# Altium PCB PCB1.PcbDoc
Units mm, origin at the board's own origin, x right, y up, seen from the top; angles counter-clockwise.
Board outline 67 x 60 mm, 2 copper layers (Top Layer, Bottom Layer); 66 components, 52 nets, 188 pads, 45 vias.
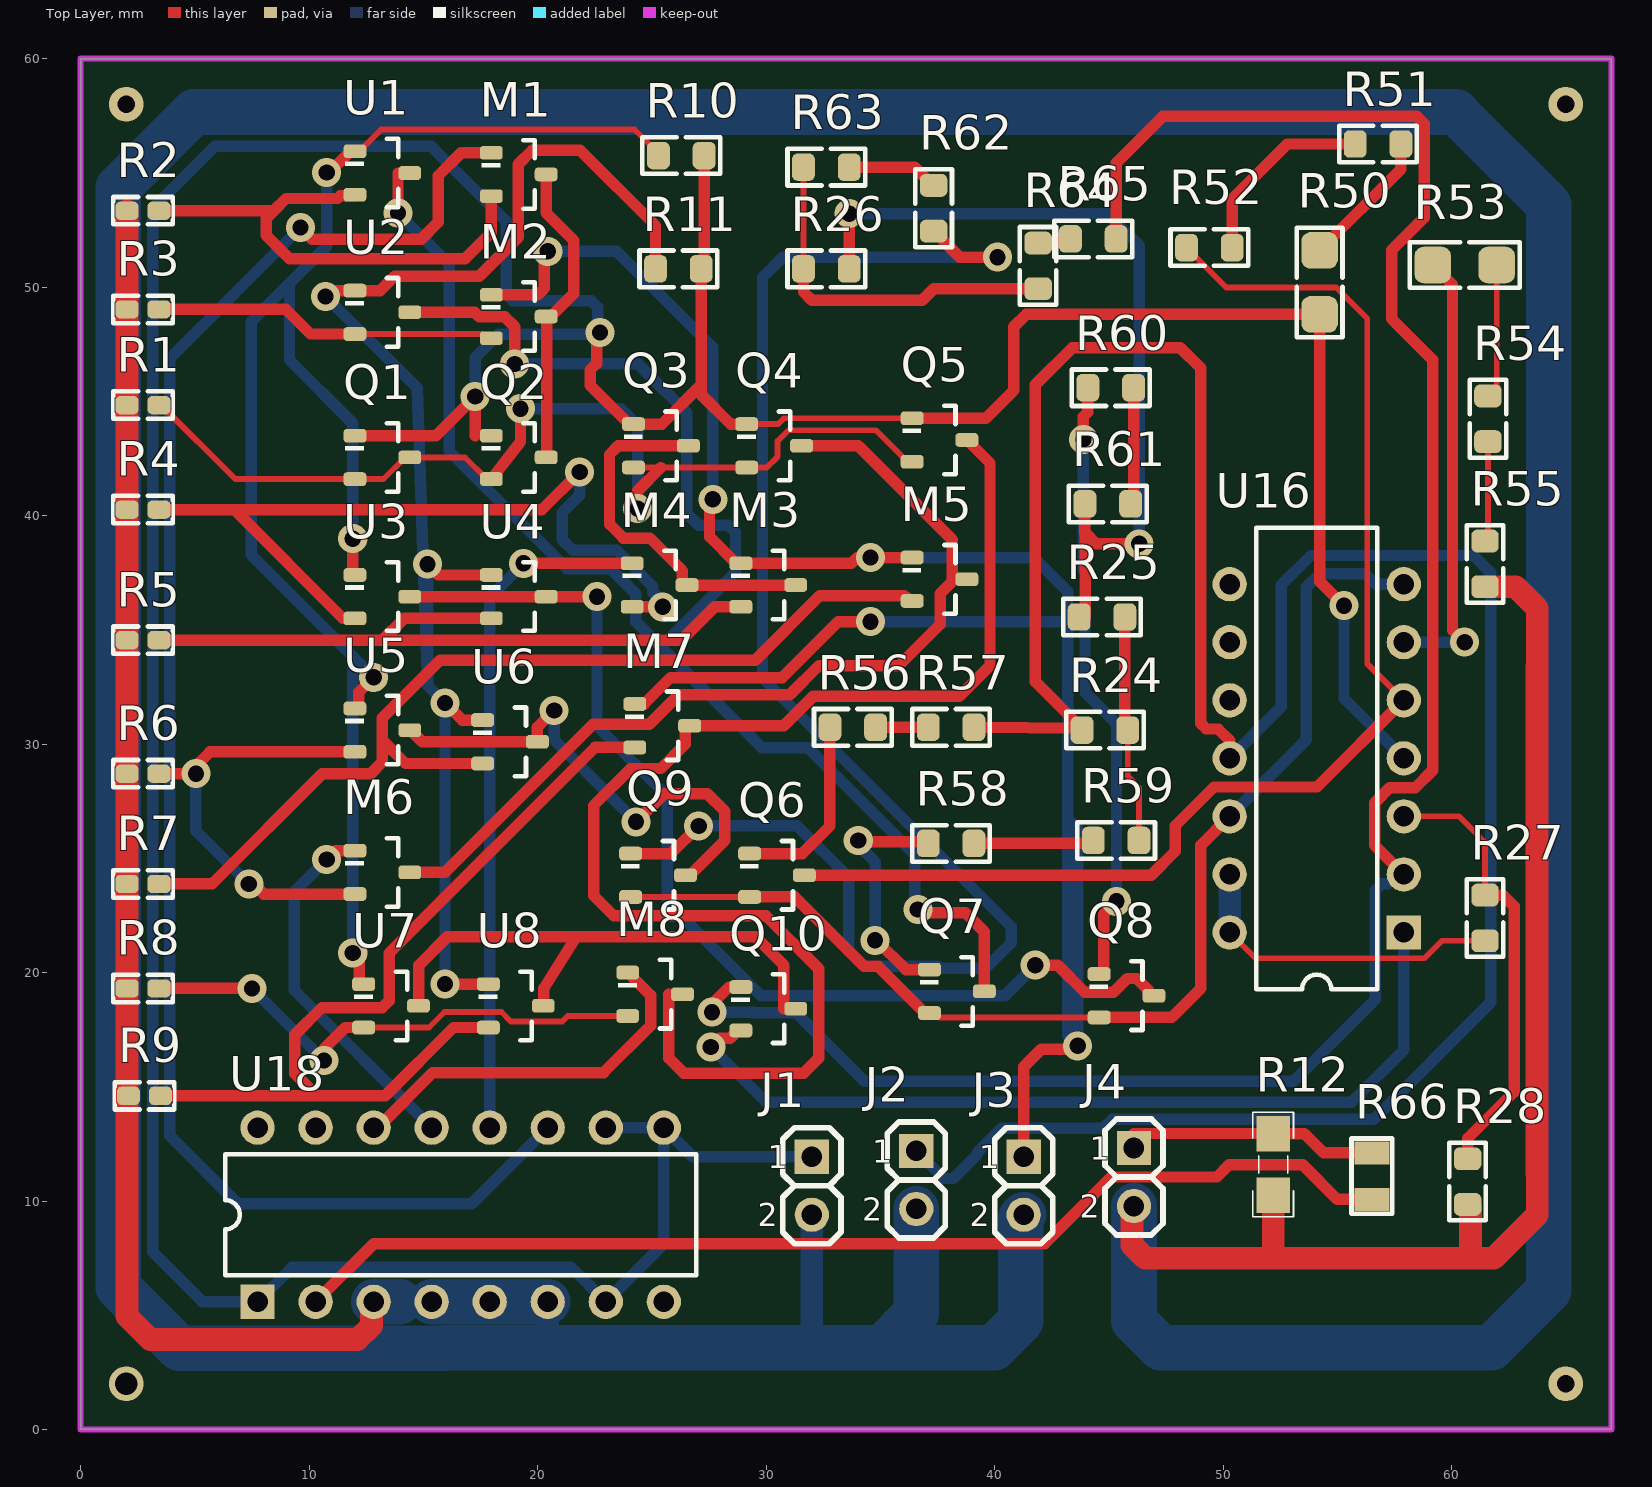
[diagram p0: Top Layer view]
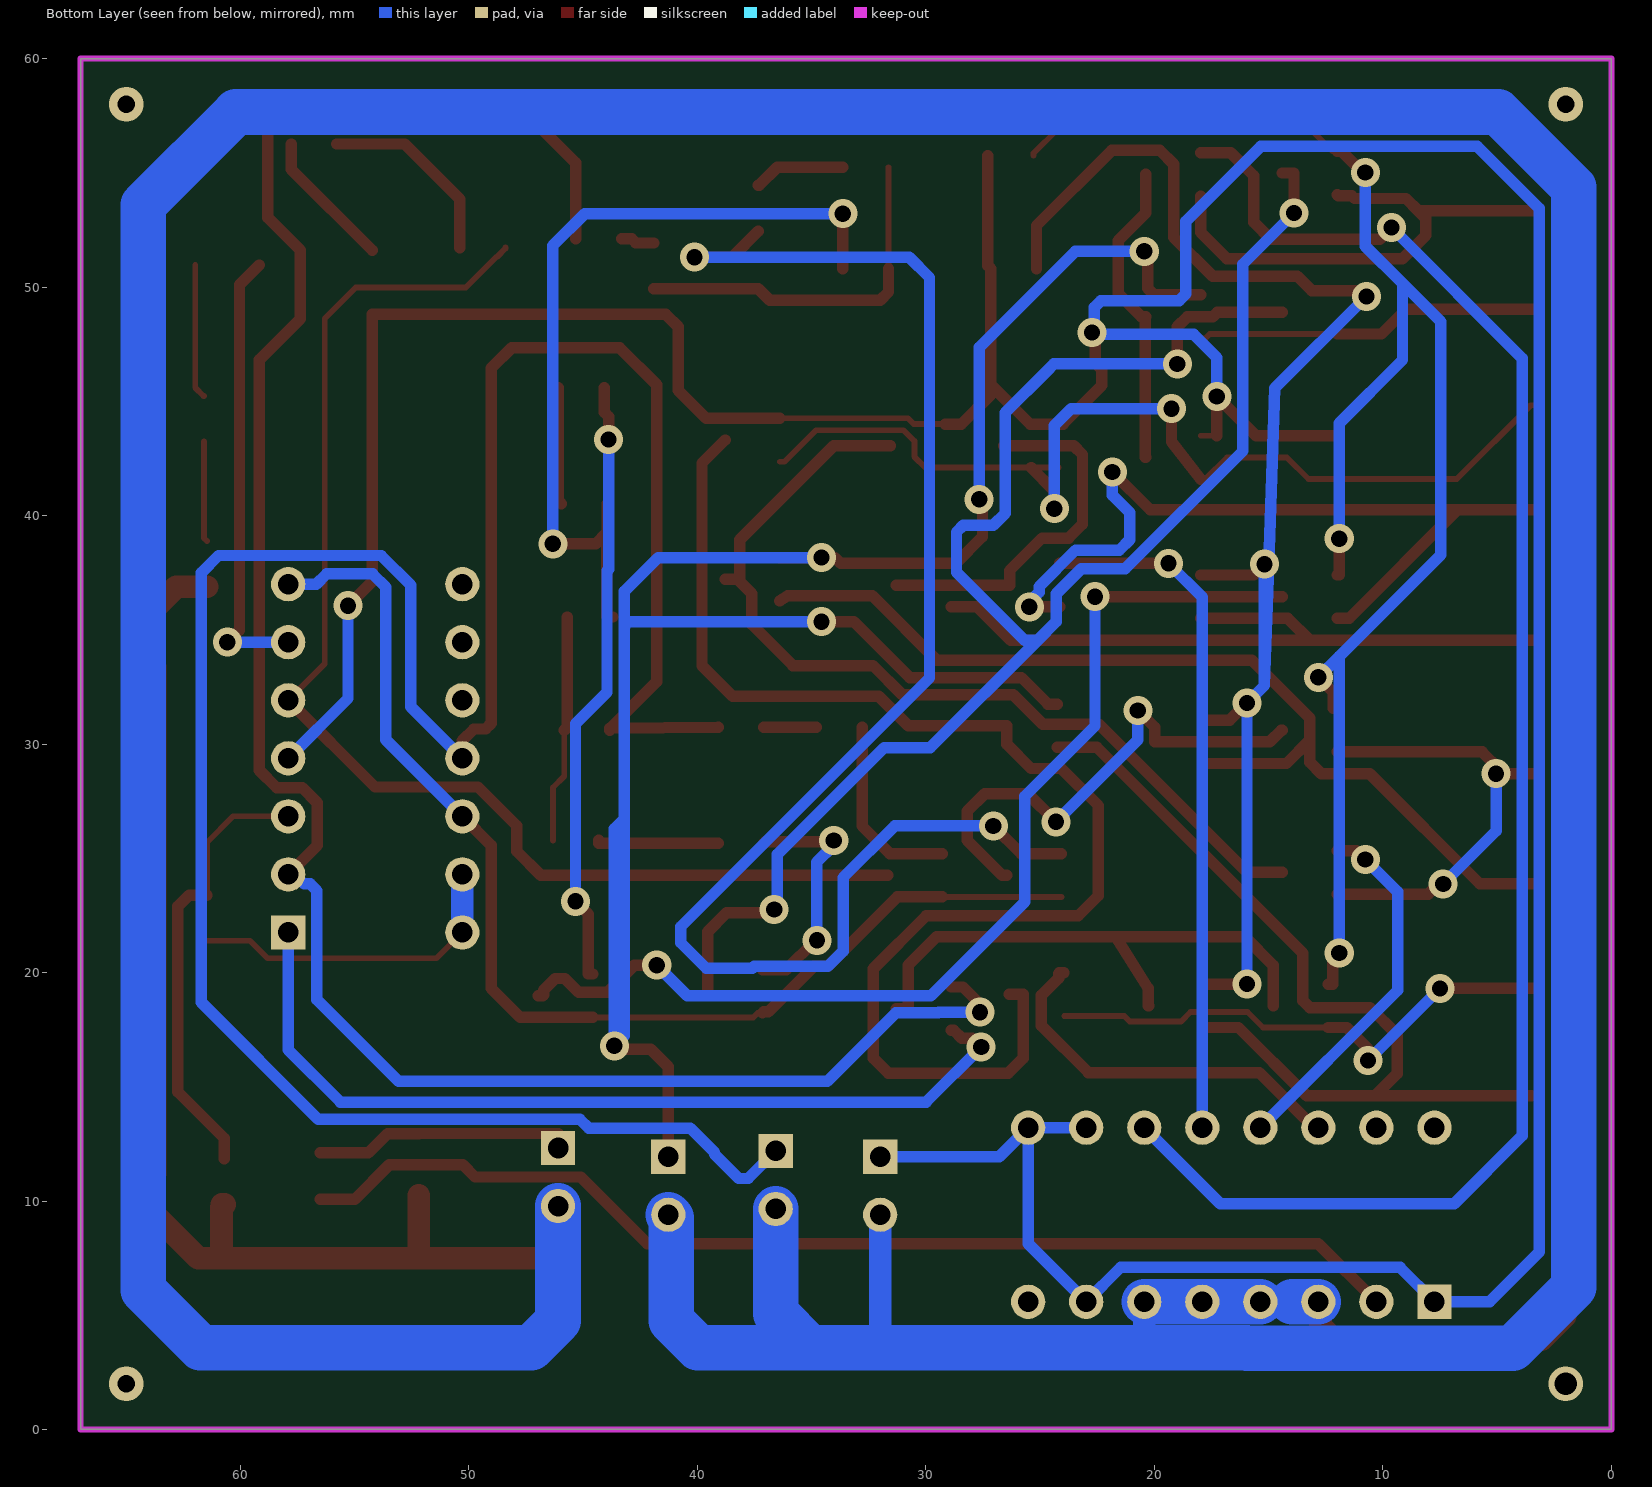
[diagram p1: Bottom Layer view, seen from below]

## Layer stack, top to bottom
Top Solder: solder mask 0.0102, Solder Resist, Dk 3.5
Top Layer: signal copper 0.0356
Dielectric 1: dielectric 0.32, FR-4, Dk 4.8
Bottom Layer: signal copper 0.0356
Bottom Solder: solder mask 0.0102, Solder Resist, Dk 3.5

## Board outline
0,0 0,60 67,60 67,0

## Design rules (kind name [scope] priority, off if disabled: settings)
Clearance [All] p1: gap=0.254 ignorepadtopadclearanceinfootprint=FALSE except(0: Arc-Hole Track-Hole SMDPad-Hole THPad-Hole Via-Hole Fill-Hole Poly-Hole Region-Hole Text-Hole)
PolygonConnect [All] p1: connectstyle=Relief reliefconductorwidth=0.254 reliefentries=4 polygonreliefangle="90 Angle" airgapwidth=0.254
RoutingVias [All] p1: holewidth=0.711 width=1.27 viastyle="Through Hole" minholewidth=0.711 minwidth=1.27 maxholewidth=0.711 maxwidth=1.27
SolderMaskExpansion [All] p1: expansion=0.102 istentingtop=FALSE
Width [All] p1: maxlimit=2 minlimit=0.254 preferedwidth=0.5 minimp=50.000000 maximp=50.000000 favimp=50.000000
30 further rules are at their usual default settings.

## Components (designator, comment, footprint, x,y, rotation, side; value= is the part's Value field where it differs from the comment)
J1 "+5 _ GND" MHDR1X02-254P 32.004,11.938 r270 top
J2 "-5 _ GND" MHDR1X02-254P 36.576,12.192 r270 top
J3 "+1.58 _ GND" MHDR1X02-254P 41.275,11.938 r270 top
J4 "CLK _ GND" MHDR1X02-254P 46.101,12.319 r270 top
M1 "BSS84" SOT-23 19.177,54.93 r0 top
M2 "BSS84" SOT-23 19.177,48.707 r0 top
M3 "BSS84" SOT-23 30.099,36.957 r0 top
M4 "BSS84" SOT-23 25.343,36.957 r0 top
M5 "BSS84" SOT-23 37.592,37.211 r0 top
M6 "BSS84" SOT-23 13.208,24.384 r0 top
M7 "BSS84" SOT-23 25.457,30.8 r0 top
M8 "BSS84" SOT-23 25.146,19.05 r0 top
Q1 "BC857" SOT-23 13.208,42.545 r0 top
Q2 "BC857" SOT-23 19.177,42.545 r0 top
Q3 "BC857" SOT-23 25.4,43.053 r0 top
Q4 "BC857" SOT-23 30.353,43.053 r0 top
Q5 "BC857" SOT-23 37.592,43.307 r0 top
Q6 "BC847" SOT-23 30.48,24.257 r0 top
Q7 "BC847" SOT-23 38.354,19.177 r0 top
Q8 "BC847" SOT-23 45.777,18.984 r0 top
Q9 "BC847" SOT-23 25.273,24.257 r0 top
Q10 "BC847" SOT-23 30.099,18.415 r0 top
R1 "1k" R0603 2.732,44.831 r0 top
R2 "1k" R0603 2.732,53.34 r0 top
R3 "1k" R0603 2.732,49.022 r0 top
R4 "1k" R0603 2.732,40.259 r0 top
R5 "1k" R0603 2.732,34.544 r0 top
R6 "1k" R0603 2.732,28.702 r0 top
R7 "1k" R0603 2.732,23.876 r0 top
R8 "1k" R0603 2.732,19.304 r0 top
R9 "1k" R0603 2.794,14.605 r0 top
R10 "47" R0805 26.289,55.753 r0 top value=50
R11 "47" R0805 26.162,50.8 r0 top value=50
R12 "10K" RESC3413X04N 52.197,11.595 r90 top
R24 "68" R0805 44.831,30.607 r180 top
R25 "68" R0805 44.704,35.56 r0 top
R26 "68" R0805 32.639,50.8 r0 top
R27 "68" R0805 61.468,22.39 r270 top
R28 "68" R0805 60.706,10.849 r270 top
R50 "100" R1206 54.229,50.203 r270 top value=157
R51 "10" R0805 56.785,56.261 r0 top value=157
R52 "47" R0805 49.403,51.727 r0 top value=157
R53 "100" R1206 60.579,50.965 r180 top value=157
R54 "10" R0805 61.595,44.234 r90 top value=157
R55 "47" R0805 61.468,37.884 r90 top value=157
R56 "68" R0805 33.798,30.734 r0 top
R57 "68" R0805 38.1,30.734 r0 top
R58 "68" R0805 38.1,25.654 r0 top
R59 "68" R0805 45.323,25.781 r0 top
R60 "68" R0805 45.085,45.593 r0 top
R61 "68" R0805 44.958,40.513 r180 top
R62 "68" R0805 37.338,53.451 r90 top
R63 "68" R0805 32.639,55.245 r180 top
R64 "68" R0805 41.91,50.927 r90 top
R65 "68" R0805 44.323,52.108 r0 top
R66 "Resistor SMD 0805" SMD-0805-RES 56.515,11.087 r180 top value=33
U1 "2N7002" SOT-23 13.208,54.991 r0 top
U2 "2N7002" SOT-23 13.208,48.895 r0 top
U3 "2N7002" SOT-23 13.208,36.449 r0 top
U4 "2N7002" SOT-23 19.177,36.449 r0 top
U5 "2N7002" SOT-23 13.208,30.607 r0 top
U6 "2N7002" SOT-23 18.796,30.099 r0 top
U7 "2N7002" SOT-23 13.589,18.542 r0 top
U8 "2N7002" SOT-23 19.05,18.542 r0 top
U16 "LF347" DIP14 54.102,29.375 r90 top
U18 "74LS161A" "DIP 16" 16.637,9.398 r90 top

## Footprints (in the part's own frame and the unit in brackets; to place one, negate y for a bottom-side part, rotate by r counter-clockwise, add the part's x,y. Pads: shape width x height; smd on the part's side, far side on the other; paste and mask are expansions set on the pad)
DIP14 [mm] "DIP; 14 Leads; Row Spacing 7.62 mm; Pitch 2.54 mm"
  rect 1.5x1.5 hole 0.9: 1(-7.62,-3.81)
  round 1.5 hole 0.9: 2(-5.08,-3.81) 3(-2.54,-3.81) 4(0,-3.81) 5(2.54,-3.81) 6(5.08,-3.81) 7(7.62,-3.81) 8(7.62,3.81) 9(5.08,3.81) 10(2.54,3.81) 11(0,3.81) 12(-2.54,3.81) 13(-5.08,3.81) 14(-7.62,3.81)
  silkscreen extent -10.1,-2.65 10.1,2.65
"DIP 16" [mm] "DIP; 16 Leads; Row Spacing 7.62 mm; Pitch 2.54 mm (www.Smartw.ir)"
  rect 1.5x1.5 hole 0.9: 1(-3.81,8.89)
  round 1.5 hole 0.9: 2(-3.81,6.35) 3(-3.81,3.81) 4(-3.81,1.27) 5(-3.81,-1.27) 6(-3.81,-3.81) 7(-3.81,-6.35) 8(-3.81,-8.89) 9(3.81,-8.89) 10(3.81,-6.35) 11(3.81,-3.81) 12(3.81,-1.27) 13(3.81,1.27) 14(3.81,3.81) 15(3.81,6.35) 16(3.81,8.89)
  silkscreen extent -2.65,-10.3 2.65,10.3, body extent -3.93,-10 3.94,10, height 5.08
MHDR1X02-254P [mm] "Male Header 1X02 with 2.54 mm Pitch"
  rect 1.5x1.5 hole 0.9: 1(0,0)
  round 1.5 hole 0.9: 2(2.54,0)
  silkscreen extent -1.27,-1.27 3.81,1.27, body extent -1.27,-1.27 3.81,1.27, height 8.43
R0603 [mm] "CHIP Resistor 1/10 WATT, 1.6x0.8mm, 0603, 1608"
  rrect50% 1x0.8 smd mask+0.05: 1(-0.7,0) 2(0.7,0)
  silkscreen extent -1.32,-0.6 1.32,0.6, body extent -0.85,-0.4 0.85,0.4, height 0.56
R0805 [mm] "CHIP RESISTOR 1/8 WATT ,2.0X1.3mm, 0805, 2012"
  rrect50% 1x1.2 smd mask+0.05: 1(-1,0) 2(1,0)
  Top Layer pour cut-out: -0.5,0.8 0.5,0.8 0.5,-0.8 -0.5,-0.8
  silkscreen extent -1.7,-0.8 1.7,0.8, body extent -1.15,-0.67 1.15,0.68, height 0.76
R1206 [mm] "CHIP RESISTOR 1/4 WATT, Body 3.2x1.6mm,1206, 3216"
  rrect50% 1.6x1.6 smd mask+0.075: 1(-1.4,0) 2(1.4,0)
  Top Layer pour cut-out: -0.8,1 -0.8,-1 0.8,-1 0.8,1
  silkscreen extent -2.4,-1 2.4,1, body extent -1.67,-0.86 1.68,0.87, height 0.85
RESC3413X04N [mm] "Chip Resistor, 2-Leads, Body 3/40x1/30mm, IPC Medium Density-Design:Abbas Basereh"
  rect 1.55x1.45 smd: 1(-1.35,0) 2(1.35,0)
  silkscreen extent -2.29,-0.89 2.29,0.89, body extent -1.25,-0.62 1.25,0.62, height 0.79
SMD-0805-RES [mil]
  rect 60x40 smd: 1(0,40) 2(0,-40)
  silkscreen extent -35,-65 35,65, body extent -24,-39 26,39, height 31
SOT-23 [mm] "SOT23, 3-Leads, Body 2.9x1.3mm, Pitch 0.95mm, Lead Span 2.5mm, IPC Medium Density (www.Smartw.ir)"
  rrect50% 1x0.6 smd: 1(-1.2,0.95) 2(-1.2,-0.95) 3(1.2,0)
  silkscreen extent -1.62,-1.5 0.7,1.5, body extent -1.16,-1.45 1.21,1.45, height 1

## Part data
J1 J2 J3 J4: library part "Header 2", "Header, 2-Pin", ComponentLinkp-URL=https://www.smartw.ir/, DatasheetVersion=2020
M1 M2 M3 M4 M5 M6 M7 M8: PSpiceTemplate="X^@REFDES %g %s %d @MODEL", Schematics' Source Library=H:\Fertige_Modelle\BSx\Files\Bss_l0_2.slb
Q1: BiasValue Power=2.857mW, PSpiceTemplate="Q^@REFDES %C %B %E @MODEL ?AREA/@AREA/", PCB Footprint=sot23
Q2 Q3 Q4 Q5 Q7 Q8 Q9 Q10: PSpiceTemplate="Q^@REFDES %C %B %E @MODEL ?AREA/@AREA/", PCB Footprint=sot23
Q6: BiasValue Power=20.78mW, PSpiceTemplate="Q^@REFDES %C %B %E @MODEL ?AREA/@AREA/", PCB Footprint=sot23
R1: library part R, BiasValue Power=18.75mW, MAX_TEMP=RTMAX, POWER=RMAX, PSpiceTemplate="R^@REFDES %1 %2 ?TOLERANCE|R^@REFDES| @VALUE TC=@TC1,@TC2 ?TOLERANCE|\n.model R^@REFDES RES R=1 DEV=@TOLERANCE% TC1=@TC1 TC2=@TC2|", VOLTAGE=RVMAX, DIST=FLAT, PCB Footprint=AXRC05, PSpice Model Type=0011, SLOPE=RSMAX, TC1=0, TC2=0
R2 R3 R4 R5 R6 R7 R8 R9 R11: library part R, MAX_TEMP=RTMAX, POWER=RMAX, PSpiceTemplate="R^@REFDES %1 %2 ?TOLERANCE|R^@REFDES| @VALUE TC=@TC1,@TC2 ?TOLERANCE|\n.model R^@REFDES RES R=1 DEV=@TOLERANCE% TC1=@TC1 TC2=@TC2|", VOLTAGE=RVMAX, DIST=FLAT, PCB Footprint=AXRC05, PSpice Model Type=0011, SLOPE=RSMAX, TC1=0, TC2=0
R10: library part R, BiasValue Power=53.73mW, MAX_TEMP=RTMAX, POWER=RMAX, PSpiceTemplate="R^@REFDES %1 %2 ?TOLERANCE|R^@REFDES| @VALUE TC=@TC1,@TC2 ?TOLERANCE|\n.model R^@REFDES RES R=1 DEV=@TOLERANCE% TC1=@TC1 TC2=@TC2|", VOLTAGE=RVMAX, DIST=FLAT, PCB Footprint=AXRC05, PSpice Model Type=0011, SLOPE=RSMAX, TC1=0, TC2=0
R12: library part "RES 0805 0.125W", "RES 0805", Data=16-12-2016, Desc.="RES SMD 0805", Designer="Abbas Basereh"
R24: library part R, BiasValue Power=73.36mW, MAX_TEMP=RTMAX, POWER=RMAX, PSpiceTemplate="R^@REFDES %1 %2 ?TOLERANCE|R^@REFDES| @VALUE TC=@TC1,@TC2 ?TOLERANCE|\n.model R^@REFDES RES R=1 DEV=@TOLERANCE% TC1=@TC1 TC2=@TC2|", VOLTAGE=RVMAX, DIST=FLAT, PCB Footprint=AXRC05, PSpice Model Type=0011, SLOPE=RSMAX, TC1=0, TC2=0
R25: library part R, BiasValue Power=19.96mW, MAX_TEMP=RTMAX, POWER=RMAX, PSpiceTemplate="R^@REFDES %1 %2 ?TOLERANCE|R^@REFDES| @VALUE TC=@TC1,@TC2 ?TOLERANCE|\n.model R^@REFDES RES R=1 DEV=@TOLERANCE% TC1=@TC1 TC2=@TC2|", VOLTAGE=RVMAX, DIST=FLAT, PCB Footprint=AXRC05, PSpice Model Type=0011, SLOPE=RSMAX, TC1=0, TC2=0
R26: library part R, BiasValue Power=6.548mW, MAX_TEMP=RTMAX, POWER=RMAX, PSpiceTemplate="R^@REFDES %1 %2 ?TOLERANCE|R^@REFDES| @VALUE TC=@TC1,@TC2 ?TOLERANCE|\n.model R^@REFDES RES R=1 DEV=@TOLERANCE% TC1=@TC1 TC2=@TC2|", VOLTAGE=RVMAX, DIST=FLAT, PCB Footprint=AXRC05, PSpice Model Type=0011, SLOPE=RSMAX, TC1=0, TC2=0
R27 R28 R56 R57 R58 R59 R60 R61 R62 R63 R64 R65: library part R, BiasValue Power=21.75uW, MAX_TEMP=RTMAX, POWER=RMAX, PSpiceTemplate="R^@REFDES %1 %2 ?TOLERANCE|R^@REFDES| @VALUE TC=@TC1,@TC2 ?TOLERANCE|\n.model R^@REFDES RES R=1 DEV=@TOLERANCE% TC1=@TC1 TC2=@TC2|", VOLTAGE=RVMAX, DIST=FLAT, PCB Footprint=AXRC05, PSpice Model Type=0011, SLOPE=RSMAX, TC1=0, TC2=0
R50 R51 R52 R53 R54 R55: library part R, BiasValue Power=159.6mW, MAX_TEMP=RTMAX, POWER=RMAX, PSpiceTemplate="R^@REFDES %1 %2 ?TOLERANCE|R^@REFDES| @VALUE TC=@TC1,@TC2 ?TOLERANCE|\n.model R^@REFDES RES R=1 DEV=@TOLERANCE% TC1=@TC1 TC2=@TC2|", VOLTAGE=RVMAX, DIST=FLAT, PCB Footprint=AXRC05, PSpice Model Type=0011, SLOPE=RSMAX, TC1=0, TC2=0
U1 U2 U3 U4 U5 U6 U7 U8: PSpiceTemplate="X^@REFDES %DRAIN %GATE %SOURCE @MODEL", PCB Footprint=SOT23
U18: PSpiceTemplate="X^@REFDES %CLK %ENP %ENT %C\L\R\ %L\O\A\D\ %A %B %C %D %QA %QB %QC %QD %RCO %VCC %GND @MODEL PARAMS:\n+ IO_LEVEL=@IO_LEVEL MNTYMXDLY=@MNTYMXDLY", IO_LEVEL=0, MNTYMXDLY=0, PCB Footprint=DIP10016W300L900
R66: ComponentLink1Description="Website Smart World", ComponentLink1URL=https://www.smartw.ir/, ComponentLink2Description=Telegram, ComponentLink2URL=https://t.me/altium_smartw, ComponentLink3Description=Instagram, ComponentLink3URL=https://Instagram.com/smartgw.ir, DatasheetVersion=2021
U16: PCB Footprint=DIP14_3, TOL_ON_OFF=ON

## Free pads (board coordinates)
  round 1.524 hole 1: 6(2,2)
  round 1.524 hole 0.762: 7(2,58) 8(65,58) 9(65,2)

## Via types
v1: diameter 1.27, hole 0.711, Top Layer to Bottom Layer, 45 vias

## Nets (pads, with @x,y where several pads share a name; then routed paths per layer and width w, separated by ;. In a path a pad name is that pad's centre, name@x,y a point inside that pad or via, vN(x,y) a via of type N, cw(c..) or ccw(c..) an arc to the next point about the centre after c; other vN are vias at no path point)
+1V58: J3.1 M2.1 M3.1 M5.1 M7.1 | length 97.5
  Top Layer w0.5: M2.1 20.007,49.657 20.3,49.95 20.3,51.415 v1(20.447,51.562) ; M7.1 24.663,31.75 25.821,32.907 30.709,32.907 33.158,35.357 v1(34.569,35.357) ; v1(27.672,40.712) 27.526,40.566 27.526,39.08 28.699,37.907 33.731,37.907 33.985,38.161 v1(34.57,38.161) M5.1 ; J3.1 41.275,15.875 42.042,16.642 43.492,16.642 v1(43.639,16.789)
  Bottom Layer w0.5: v1(20.447,51.562) 23.47,51.562 27.672,47.36 v1(27.672,40.712) ; v1(34.569,35.357) 43.002,35.357 43.205,35.154 ; v1(34.57,38.161) 41.722,38.161 43.205,36.678 43.205,35.357 43.205,35.154 ; 43.205,26.721 43.205,35.154 ; 43.205,26.721 43.639,26.287 v1(43.639,16.789) 43.205,17.223 43.205,26.721
+5V: J1.1 Q1.1 Q2.1 Q3.1 Q4.1 Q5.1 R10.2 R11.2 R50.2 U16.4 U18.1 U18.7 U18.9 U18.10 | length 199.9
  Top Layer w0.254: 17.272,43.495 Q2.1 ; Q4.1 30.534,44.003 30.788,44.257 Q5.1
  Top Layer w0.5: Q1.1 15.555,43.495 v1(17.272,45.212) 17.272,43.495 ; v1(22.733,48.006) 22.586,47.859 22.586,46.65 22.301,46.366 22.301,45.702 24,44.003 25.445,44.003 27.162,45.72 ; R10.2 27.289,50.927 R11.2 27.162,45.72 ; Q4.1 28.448,44.003 27.162,45.289 27.162,45.72 ; Q5.1 39.624,44.257 40.843,45.476 40.843,48.26 41.386,48.803 R50.2 54.229,37.122 v1(55.296,36.055)
  Bottom Layer w0.5: v1(17.272,45.212) 17.272,46.914 18.288,47.93 22.657,47.93 v1(22.733,48.006) 22.635,48.104 22.635,49.11 22.342,49.403 18.923,49.403 18.63,49.696 18.63,52.871 15.347,56.154 5.869,56.154 3.155,53.44 3.155,7.767 5.334,5.588 U18.1 9.251,7.092 21.483,7.092 U18.7 25.527,8.128 U18.9 ; U18.10 U18.9 ; J1.1 26.797,11.938 U18.9 ; v1(55.296,36.055) 55.296,31.991 U16.4
-5V: J2.1 R24.2 R57.2 U16.11 | length 113.1
  Top Layer w0.5: R57.2 R24.2@43.831,30.683 ; R24.2 R24.2@43.831,30.683 ; U16.11 50.292,30.15 49.784,30.658 49.276,30.658 49.022,30.912 49.022,46.457 48.133,47.346 43.409,47.346 41.783,45.72 41.783,32.731 R24.2@43.831,30.683
  Bottom Layer w0.5: J2.1 37.783,10.985 38.197,10.985 39.257,12.044 39.257,12.133 40.316,13.192 44.761,13.192 45.142,13.573 56.601,13.573 61.722,18.694 61.722,37.49 60.96,38.252 53.848,38.252 52.553,36.957 52.553,31.636 U16.11
CLK_IN: R66.1 U18.2 | length 49.3
  Top Layer w0.5: U18.2 12.827,8.128 42.189,8.128 45.11,11.049 49.733,11.049 50.267,11.582 53.492,11.582 55.004,10.071 R66.1
CLK_RAW: J4.1 R12.2 R66.2 | length 11.4
  Top Layer w0.5: J4.1 46.101,12.954 52.197,12.954 R12.2 53.565,12.945 54.407,12.103 R66.2
GND: J1.2 J2.2 J3.2 J4.2 R1.1 R2.1 R3.1 R4.1 R5.1 R6.1 R7.1 R8.1 R9.1 R12.1 R28.2 R55.1 U18.3 U18.4 U18.5 U18.6 | length 394.1
  Top Layer w0.5: R8.1 1.965,19.304 1.965,23.876 R7.1 ; 63.5,11.176 63.5,33.401
  Top Layer w1: R2.1 R3.1 R1.1 R4.1 R5.1 R6.1 R7.1 R8.1 2.032,4.953 3.048,3.937 12.124,3.937 12.731,4.544 12.731,5.492 U18.3 ; J4.2 46.01,9.688 46.01,8.079 46.596,7.493 52.197,7.493 ; R12.1 52.197,7.493 ; R28.2 60.806,9.849 60.806,9.749 60.833,9.722 60.833,7.493 ; R55.1 62.811,36.884 63.754,35.941 63.754,9.398 61.849,7.493 60.833,7.493 ; 52.197,7.493 60.833,7.493
  Bottom Layer w1: 20.447,4.084 U18.6 ; 32.004,4.211 J1.2
  Bottom Layer w2: U18.3 13.97,5.588 ; U18.4 U18.5 U18.6 ; J2.2 36.576,5.08 35.08,3.584 ; J3.2 41.148,9.271 41.148,4.756 39.976,3.584 35.08,3.584 ; J4.2 46.101,4.756 47.273,3.584 61.75,3.584 64.262,6.096 64.262,53.594 60.198,57.658 4.953,57.658 1.651,54.356 1.651,6.223 4.318,3.556 15.946,3.556 15.974,3.584 35.08,3.584
NetM1_1: M1.1 U18.11 | length 72.6
  Top Layer w0.5: v1(9.627,52.603) 10.135,52.095 14.91,52.095 15.646,52.832 15.646,54.864 16.662,55.88 M1.1
  Bottom Layer w0.5: v1(9.627,52.603) 3.909,46.886 3.909,12.855 6.883,9.881 17.12,9.881 U18.11
NetM1_2: M1.2 R2.2 U1.2 | length 22.4
  Top Layer w0.5: R2.2 8.454,53.34 ; U1.2 11.958,53.991 11.356,53.991 11.241,53.876 8.99,53.876 8.454,53.34 ; M1.2 17.983,53.98 17.983,52.398 16.828,51.243 9.144,51.243 8.128,52.259 8.128,53.014 8.454,53.34
NetM1_3: M1.3 M2.3 Q2.3 | length 13.5
  Top Layer w0.5: Q2.3 20.396,42.545 M2.3@20.396,48.707 ; M2.3 M2.3@20.396,48.707 ; M1.3 20.377,53.243 21.586,52.034 21.586,49.716 20.577,48.707 M2.3@20.396,48.707
NetM2_2: M2.2 R3.2 U2.2 | length 15.1
  Top Layer w0.254: U2.2 17.576,47.945 17.765,47.757 M2.2
  Top Layer w0.5: R3.2 8.992,49.022 10.069,47.945 U2.2
NetM3_2: M3.2 R5.2 U4.2 | length 31.2
  Top Layer w0.5: R5.2 13.208,34.544 ; U4.2 14.163,35.499 13.208,34.544 ; M3.2 27.752,36.007 26.289,34.544 13.208,34.544
NetM3_3: M3.3 M4.3 Q3.3 | length 16.3
  Top Layer w0.5: Q3.3 23.531,43.053 23.15,42.672 23.15,39.624 23.76,39.014 24.917,39.014 26.34,37.592 26.34,36.957 M4.3 M3.3
NetM4_1: M4.1 U18.12 | length 30.1
  Top Layer w0.5: v1(19.38,37.907) M4.1
  Bottom Layer w0.5: U18.12 17.907,36.434 v1(19.38,37.907)
NetM4_2: M4.2 R4.2 U3.2 | length 36.8
  Top Layer w0.5: R4.2 6.724,40.259 ; U3.2 11.484,35.499 6.724,40.259 ; v1(21.844,41.91) 20.193,40.259 6.724,40.259 ; M4.2 v1(25.476,36.007)
  Bottom Layer w0.5: v1(21.844,41.91) 21.844,40.894 21.082,40.132 21.082,38.939 21.535,38.486 23.453,38.486 25.051,36.888 25.051,36.641 25.476,36.215 v1(25.476,36.007)
NetM5_2: M5.2 R7.2 U6.2 | length 44.2
  Top Layer w0.5: R7.2 5.755,23.876 10.581,28.702 12.702,28.702 13.208,29.208 13.208,30.165 ; U6.2 14.224,29.149 13.208,30.165 ; M5.2 36.048,36.496 32.356,36.496 29.524,33.664 15.732,33.664 13.208,31.14 13.208,30.165
NetM5_3: M5.3 M6.3 Q4.3 | length 40.6
  Top Layer w0.5: M6.3 15.951,24.384 22.428,30.861 24.892,30.861 26.184,32.153 31.037,32.153 32.318,33.434 35.822,33.434 37.617,35.23 37.617,36.576 38.252,37.211 ; Q4.3 34.036,43.053 38.151,38.938 38.151,37.211 38.252,37.211 ; M5.3 38.252,37.211
NetM6_1: M6.1 U18.13 | length 16.2
  Top Layer w0.5: v1(10.77,24.943) 11.161,25.334 M6.1
  Bottom Layer w0.5: v1(10.77,24.943) 9.36,23.533 9.36,19.215 U18.13
NetM6_2: M6.2 R6.2 U5.2 | length 19.7
  Top Layer w0.5: R6.2 v1(5.048,28.702) ; v1@4.876,28.874 5.659,29.657 U5.2 ; v1(7.366,23.876) 7.574,23.876 8.016,23.434 M6.2
  Bottom Layer w0.5: v1(5.048,28.702) 5.048,26.194 v1(7.366,23.876)
NetM7_2: M7.2 R9.2 U8.2 | length 40
  Top Layer w0.5: R9.2 10.344,14.605 ; U8.2 16.322,17.592 13.335,14.605 10.344,14.605 ; M7.2 22.514,29.85 13.513,20.849 13.513,18.771 13.208,18.466 10.566,18.466 9.373,17.272 9.373,15.576 10.344,14.605
NetM7_3: M7.3 M8.3 Q5.3 | length 60.2
  Top Layer w0.5: M8.3 25.742,19.05 25.742,16.256 26.399,15.6 31.652,15.6 32.309,16.256 32.309,20.168 29.997,22.479 23.343,22.479 22.454,23.368 22.454,27.305 24.079,28.931 25.4,28.931 26.467,29.997 26.467,30.8 M7.3 30.775,30.8 32.065,32.09 38.466,32.09 39.802,33.426 39.802,42.297 Q5.3
NetM8_1: M8.1 U18.14 | length 16.8
  Top Layer w0.254: M8.1 M8.1@23.96,19.986
  Top Layer w0.5: U18.14 13.004,13.208 15.417,15.621 22.892,15.621 24.95,17.679 24.95,18.996 24.196,19.75 24.196,19.95 24.16,19.986 M8.1@23.96,19.986
NetM8_2: M8.2 R8.2 U7.2 | length 23.3
  Top Layer w0.254: U7.2 15.25,17.592 15.931,18.273 18.42,18.273 18.832,17.861 21.084,17.861 21.323,18.1 M8.2
  Top Layer w0.5: R8.2 v1(7.503,19.304) ; v1(10.653,16.154) 10.653,16.662 11.582,17.592 U7.2
  Bottom Layer w0.5: v1(7.503,19.304) v1(10.653,16.154)
NetQ1_2: Q1.2 Q1.3 Q2.2 Q3.2 Q4.2 Q5.2 R1.2 | length 45.3
  Top Layer w0.254: R1.2 3.532,44.831 6.768,41.595 Q1.2 13.258,41.595 14.208,42.545 Q1.3 16.827,42.545 17.777,41.595 Q2.2 ; Q3.2 25.4,42.103 Q4.2 30.034,42.103 30.508,42.578 30.508,43.26 30.983,43.734 34.815,43.734 36.192,42.357 Q5.2
  Top Layer w0.5: Q2.2 19.253,43.231 v1(19.253,44.679) ; v1(24.384,40.299) 24.384,41.087 25.4,42.103
  Bottom Layer w0.5: v1(19.253,44.679) 23.647,44.679 24.384,43.942 v1(24.384,40.299)
NetQ6_1: Q6.1 R56.1 | length 8.3
  Top Layer w0.5: Q6.1 31.589,25.207 32.798,26.416 R56.1
NetQ6_2: Q6.2 Q7.2 Q8.2 Q9.2 U16.7 U16.12 | length 51.8
  Top Layer w0.254: Q9.2 Q6.2 ; Q7.2 37.366,18.227 37.559,18.034 Q8.2
  Top Layer w0.5: Q6.2 31.256,23.307 34.296,20.268 34.913,20.268 36.904,18.277 37.104,18.277 Q7.2 ; Q8.2 47.752,18.034 49.022,19.304 49.022,25.565 U16.12
  Bottom Layer w0.5: U16.12 53.645,30.188 53.645,36.868 54.221,37.444 56.237,37.444 56.686,36.995 U16.7
NetQ6_3: Q6.3 R52.1 U16.5 | length 56.6
  Top Layer w0.254: R52.1 48.403,51.694 48.767,51.33 48.8,51.33 50.146,49.984 54.952,49.984 56.313,48.623 56.313,33.514 U16.5
  Top Layer w0.5: Q6.3 46.863,24.257 47.904,25.298 47.904,26.416 49.606,28.118 54.115,28.118 U16.5
NetQ7_1: Q7.1 R58.1 | length 10.7
  Top Layer w0.5: v1(34.036,25.781) 34.099,25.717 37.037,25.717 R58.1 ; v1(34.767,21.407) 34.84,21.407 36.12,20.127 Q7.1
  Bottom Layer w0.5: v1(34.036,25.781) 34.036,25.573 34.776,24.832 34.776,21.416 v1(34.767,21.407)
NetQ7_3: Q7.3 U1.3 U2.3 | length 78.7
  Top Layer w0.5: v1(13.894,53.238) 13.894,54.991 U1.3 ; U2.3 17.247,48.895 17.45,48.692 18.567,48.692 18.999,48.26 v1(18.999,46.634) ; v1(36.642,22.754) 36.784,22.612 38.729,22.612 39.554,21.787 Q7.3
  Bottom Layer w0.5: v1(13.894,53.238) 16.129,51.003 16.129,42.825 21.287,37.668 23.205,37.668 24.297,36.576 24.297,35.359 25.111,34.544 ; v1(18.999,46.634) 24.404,46.634 24.697,46.342 26.533,44.506 26.533,40.094 27.054,39.573 28.372,39.573 28.665,39.28 28.665,37.52 25.689,34.544 25.111,34.544 ; v1(36.642,22.754) 36.5,22.896 36.5,25.172 31.827,29.845 29.81,29.845 25.111,34.544
NetQ8_1: Q8.1 R60.1 | length 26.8
  Top Layer w0.5: v1(43.891,43.332) 43.891,44.332 44.085,44.526 R60.1 ; Q8.1 44.78,19.934 44.78,22.555 v1(45.339,23.114)
  Bottom Layer w0.5: v1(43.891,43.332) 43.891,37.655 43.959,37.587 43.959,32.266 45.339,30.886 v1(45.339,23.114)
NetQ8_3: Q8.3 U3.3 U4.3 | length 47.6
  Top Layer w0.5: U3.3 U4.3 v1(22.602,36.449) ; v1@41.74,20.32 42.766,20.32 43.956,19.13 45.198,19.13 45.807,19.739 46.222,19.739 46.727,19.234 46.727,19.034 46.777,18.984 Q8.3
  Bottom Layer w0.5: v1(22.602,36.449) 22.602,30.791 25.67,27.723 25.67,23.098 29.784,18.984 40.447,18.984 v1(41.783,20.32)
NetQ9_1: Q9.1 R62.1 | length 69.8
  Top Layer w0.5: Q9.1 25.842,25.207 v1(27.051,26.416) ; R62.1 38.481,51.308 v1@40.255,51.308
  Bottom Layer w0.5: v1(27.051,26.416) 31.369,26.416 33.628,24.157 33.628,20.935 34.296,20.268 37.517,20.268 37.592,20.193 39.624,20.193 40.742,21.311 40.742,21.996 29.845,32.893 29.845,50.419 30.734,51.308 v1(40.132,51.308)
NetQ9_3: Q9.3 U5.3 U6.3 | length 22.2
  Top Layer w0.5: U5.3 14.443,30.607 14.951,30.099 U6.3 19.996,30.74 v1(20.726,31.471) ; v1(24.308,26.594) 25.542,27.827 27.432,27.827 28.194,27.065 28.194,25.781 26.67,24.257 Q9.3
  Bottom Layer w0.5: v1(20.726,31.471) 20.726,30.175 v1(24.308,26.594)
NetQ10_1: Q10.1 R65.2 U16.2 | length 94.2
  Top Layer w0.5: v1(27.635,18.263) 27.635,18.618 28.382,19.365 Q10.1 ; R65.2 45.323,55.432 47.371,57.48 58.471,57.48 58.801,57.15 58.801,53.035 57.379,51.613 57.379,48.616 59.182,46.812 59.182,28.854 58.42,28.092 57.302,28.092 56.642,27.432 56.642,25.565 U16.2
  Bottom Layer w0.5: v1(27.635,18.263) 29.439,18.263 29.472,18.23 31.325,18.23 34.315,15.24 53.086,15.24 56.658,18.812 56.658,23.583 56.951,23.876 57.222,23.876 57.641,24.295 U16.2
NetQ10_2: Q10.2 U16.1 | length 39
  Top Layer w0.5: v1(27.584,16.739) 27.965,17.12 28.433,17.12 28.778,17.465 Q10.2
  Bottom Layer w0.5: v1(27.584,16.739) 29.996,14.327 55.627,14.327 57.912,16.612 U16.1
NetQ10_3: Q10.3 U7.3 U8.3 | length 24.7
  Top Layer w0.5: U7.3 14.808,18.542 14.808,20.32 16.053,21.565 21.692,21.565 ; U8.3 20.269,18.542 20.269,19.304 21.692,21.565 ; Q10.3 30.785,18.415 30.785,20.32 29.54,21.565 21.692,21.565
NetR10_1: R10.1 U1.1 U3.1 U5.1 U7.1 | length 72
  Top Layer w0.254: U1.1 12.208,55.941 13.163,56.896 24.246,56.896 25.289,55.853 R10.1
  Top Layer w0.5: v1(10.77,55.015) 10.882,55.015 11.808,55.941 U1.1 ; v1(11.913,20.853) 12.192,20.574 12.192,19.492 U7.1 ; v1(11.913,38.989) 11.913,37.399 U3.1 ; U5.1 12.184,31.557 12.184,32.275 v1(12.827,32.918)
  Bottom Layer w0.5: v1(10.77,55.015) 10.77,51.791 9.144,50.165 ; v1(11.913,20.853) 11.913,33.833 ; v1(11.913,38.989) 11.913,44.044 9.144,46.812 9.144,50.165 ; v1(12.827,32.918) 11.913,33.833 ; 9.144,50.165 7.468,48.489 7.468,38.278 11.913,33.833
NetR11_1: R11.1 U2.1 U4.1 U6.1 U8.1 | length 66.4
  Top Layer w0.5: v1(10.719,49.591) 10.973,49.845 U2.1 13.117,49.845 13.741,50.47 17.45,50.47 19.152,52.172 19.152,55.372 19.761,55.982 21.869,55.982 25.162,52.689 R11.1 ; v1(15.189,37.871) 15.662,37.399 U4.1 ; v1(15.951,19.492) U8.1 ; v1(15.951,31.801) 16.703,31.049 U6.1
  Bottom Layer w0.5: v1(10.719,49.591) 14.732,45.578 15.003,37.865 15.189,32.563 ; v1(15.189,37.871) 15.189,32.563 ; v1(15.951,19.492) v1(15.951,31.801) 15.189,32.563
NetR24_1: R24.1 R25.2 R59.2 | length 10
  Top Layer w0.254: R24.1 45.831,28.589 46.323,28.097 R59.2
  Top Layer w0.5: R25.2 45.704,30.734 R24.1
NetR25_1: R25.1 R26.2 R61.2 | length 36.5
  Top Layer w0.5: R26.2 v1(33.639,53.213) ; R25.1 43.967,35.56 43.967,39.243 ; R61.2 43.958,39.252 43.967,39.243 ; v1(46.33,38.76) 44.45,38.76 43.967,39.243
  Bottom Layer w0.5: v1(33.639,53.213) 44.933,53.213 46.33,51.816 v1(46.33,38.76)
NetR26_1: R26.1 R63.2 R64.1 | length 16.1
  Top Layer w0.254: R26.1 R63.2
  Top Layer w0.5: R26.1 31.639,49.784 32.003,49.42 36.834,49.42 37.341,49.927 R64.1
NetR27_1: R27.1 R28.1 U16.3 | length 19.7
  Top Layer w0.254: U16.3 60.325,26.835 61.468,25.692 R27.1
  Top Layer w0.5: R28.1 60.706,12.738 62.738,14.77 62.738,22.898 62.246,23.39 R27.1
NetR27_2: R27.2 U16.13 U16.14 | length 14.5
  Top Layer w0.254: U16.14 51.423,20.624 58.82,20.624 59.586,21.39 R27.2
  Bottom Layer w1: U16.14 U16.13
NetR50_1: R50.1 R51.2 | length 6.1
  Top Layer w0.5: R50.1 57.785,55.159 R51.2
NetR51_1: R51.1 R52.2 | length 8.5
  Top Layer w0.5: R52.2 50.403,53.848 52.816,56.261 R51.1
NetR53_1: R53.1 R54.2 | length 5.9
  Top Layer w0.254: R54.2 61.615,45.234 61.979,45.598 R53.1
NetR53_2: R53.2 U16.6 | length 19.8
  Top Layer w0.5: R53.2 60.046,50.098 60.046,34.988 v1(60.579,34.455)
  Bottom Layer w0.5: U16.6 v1(60.579,34.455)
NetR54_1: R54.1 R55.2 | length 4.4
  Top Layer w0.254: R55.2 61.595,39.011 R54.1
NetR56_2: R56.2 R57.1 | length 2.3
  Top Layer w0.5: R56.2 R57.1
NetR58_2: R58.2 R59.1 | length 5.4
  Top Layer w0.5: R58.2 44.323,25.654 R59.1
NetR60_2: R60.2 R61.1 | length 5.1
  Top Layer w0.5: R61.1 46.085,40.64 R60.2
NetR62_2: R62.2 R63.1 | length 4
  Top Layer w0.5: R63.1 36.511,55.245 37.305,54.451 R62.2
NetR64_2: R64.2 R65.1 | length 1.5
  Top Layer w0.5: R64.2 42.694,51.927 42.875,52.108 R65.1
pads on no net: U16.8 U16.9 U16.10 U18.8 U18.15 U18.16

## Keep-outs
Keep-Out Layer:
  the board outline again, w0.254

## Text inside footprints (layer, text, board x,y; h text height)
J1: Top Overlay "1" at 30.068,11.43 h1; Top Overlay "2" at 29.64,8.89 h1
J2: Top Overlay "1" at 34.64,11.684 h1; Top Overlay "2" at 34.212,9.144 h1
J3: Top Overlay "1" at 39.339,11.43 h1; Top Overlay "2" at 38.911,8.89 h1
J4: Top Overlay "1" at 44.165,11.811 h1; Top Overlay "2" at 43.737,9.271 h1